# EAGLE board da15-to-de15-passive (EAGLE 6.5.0)
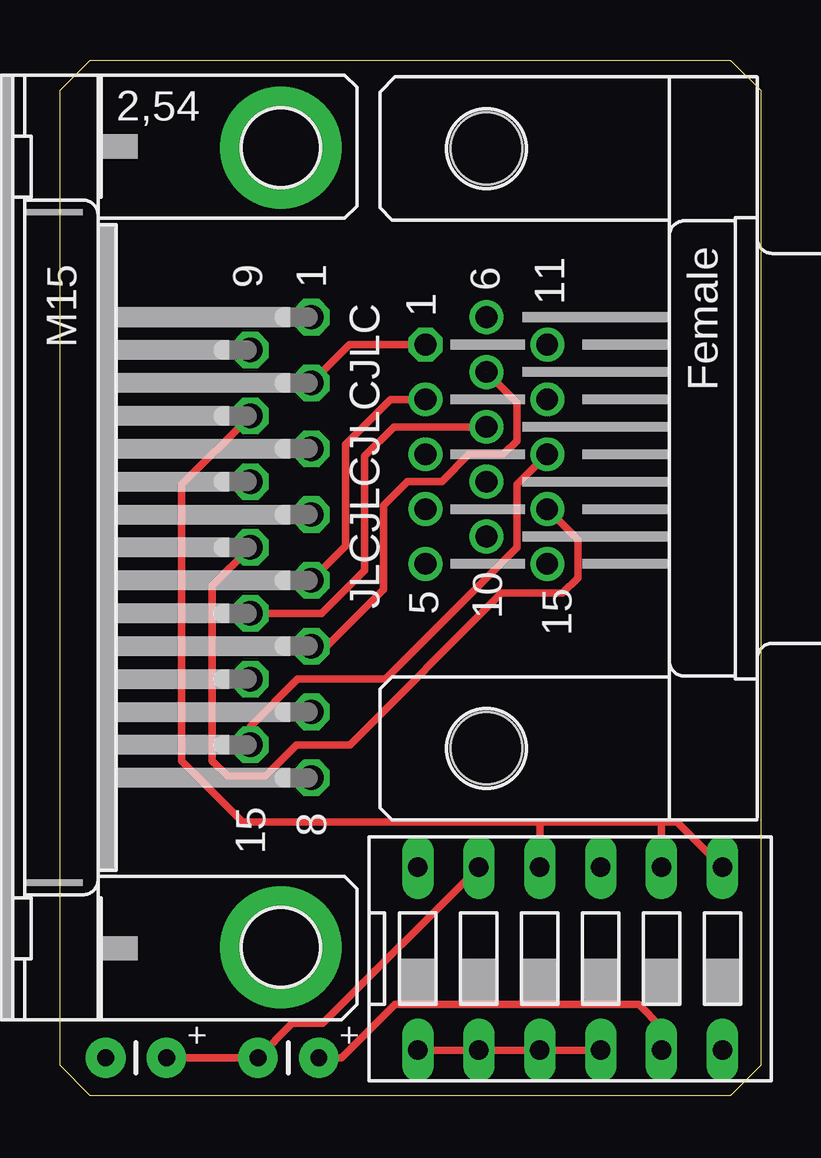
[diagram p0: board, top side]
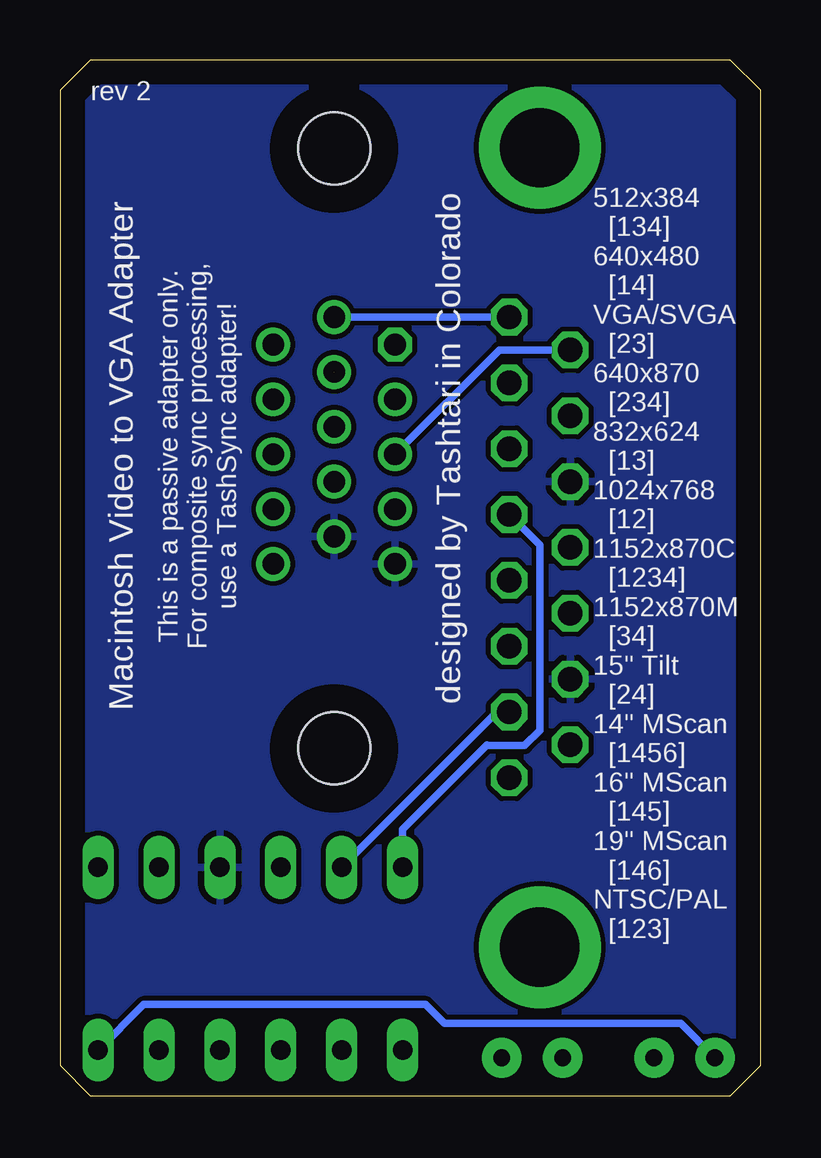
[diagram p1: board, bottom side, seen from below]

Size 29.21 x 43.18 mm. Coordinates in mm from the lower left corner, seen from the top.
Outline: 1.27,0 0,1.27 0,41.91 1.27,43.18 27.94,43.18 29.21,41.91 29.21,1.27 27.94,0 1.27,0
Copper layers (1*16): Top 0.035mm / dielectric 1.5mm / Bottom 0.035mm
Design rules "default": minimum track width 10mil, minimum drill 24mil, track to track 8mil, track to pad 8mil, pad to pad 8mil, via to via 8mil, smd to smd 8mil, copper to edge 40mil, drill to drill 8mil, minimum pad ring 10mil, minimum via ring 8mil, stop-mask expansion 4mil, vias tented up to drill 0mil, thermal gap 10mil

## Footprints (pad centres in the part's own frame; a part is rotated, then mirrored left to right if it is on the bottom)
M15HP = drill 1.016 octagon: 1 -9.601,1.27; 2 -6.858,1.27; 3 -4.115,1.27; 4 -1.372,1.27; 5 1.372,1.27; 6 4.115,1.27; 7 6.858,1.27; 8 9.601,1.27; 9 -8.23,-1.27; 10 -5.486,-1.27; 11 -2.743,-1.27; 12 0,-1.27; 13 2.743,-1.27; 14 5.486,-1.27; 15 8.23,-1.27 | drill 3.302 pad 5.08: G1 -16.662,0; G2 16.662,0
DS-06 = drill 0.813 long: 1 -6.35,-3.81; 2 -3.81,-3.81; 3 -1.27,-3.81; 4 1.27,-3.81; 5 3.81,-3.81; 6 6.35,-3.81; 7 6.35,3.81; 8 3.81,3.81; 9 1.27,3.81; 10 -1.27,3.81; 11 -3.81,3.81; 12 -6.35,3.81
HDF15H = drill 0.9 octagon: 1 4.329,2.54 | drill 0.9: 2 2.043,2.54; 3 -0.243,2.54; 4 -2.529,2.54; 5 -4.815,2.54; 6 5.472,0; 7 3.186,0; 8 0.9,0; 9 -1.386,0; 10 -3.672,0; 11 4.329,-2.54; 12 2.043,-2.54; 13 -0.243,-2.54; 14 -2.529,-2.54; 15 -4.815,-2.54 | hole 3: -12.5,0; 12.5,0
CAP-PTH-SMALL = drill 0.7 pad 1.651: 1 0,0; 2 2.54,0

## Placement (x,y rotation side)
E$1  [M15HP]  9.21,22.86 270 top
E$2  [DS-06]  21.27,5.71 0 top
E$3  [HDF15H]  17.78,26.99 90 top
E$4  [CAP-PTH-SMALL]  4.45,1.59 180 top
E$5  [CAP-PTH-SMALL]  10.79,1.59 180 top

## Library data of the parts
E$1 E$3 = con-subd
E$2 = switch-dil
E$4 E$5 = SparkFun-Passives

## Nets
GND: E$1.11 E$1.14 E$2.9 E$3.5 E$3.10
S$2: E$2.1 E$2.2 E$2.3 E$2.4
S$3: E$1.4 E$2.12
S$4: E$1.2 E$3.1
S$5: E$1.1 E$3.6
S$6: E$1.5 E$3.2
S$7: E$1.9 E$3.3
S$8: E$1.6 E$3.7
S$9: E$1.13 E$3.8
S$10: E$1.7 E$2.11 E$4.1 E$5.2
S$11: E$1.10 E$2.7 E$2.8 E$2.10
S$13: E$2.6 E$4.2
S$14: E$2.5 E$5.1
S$15: E$1.15 E$3.13
S$16: E$1.12 E$3.14

## Tracks (layer width: path | path; a pad name or v marks a point on that pad's centre or on a via)
GND
  pour Bottom: 1.91,0.64 0.64,1.91 0.64,41.27 1.91,42.55 27.3,42.55 28.57,41.27 28.57,1.91 27.3,0.64
S$2
  Top 0.305: E$2.1 E$2.2 E$2.3 E$2.4
S$3
  Bottom 0.305: E$1.4 9.21,22.96 9.21,15.24 9.84,14.61 11.38,14.61 11.4,14.63 14.92,11.11 E$2.12
S$4
  Top 0.305: E$1.2 12.08,31.32 E$3.1
S$5
  Bottom 0.305: E$1.1 11.75,32.46 E$3.6
S$6
  Top 0.305: E$1.5 11.91,22.92 11.91,27.15 13.79,29.03 E$3.2
S$7
  Bottom 0.305: E$1.9 10.89,31.09 E$3.3
S$8  (1 unrouted)
  Top 0.305: E$3.7 19.05,28.89 19.05,27.3 18.49,26.74 17.06,26.74 15.92,25.6 14.49,25.6 13.49,24.61 13.49,21.11 11.12,18.75 E$1.6
S$9
  Top 0.305: E$1.13 10.91,20.12 12.7,21.91 12.7,26.67 13.92,27.89 E$3.8
S$10
  Top 0.305: E$2.11 10.95,3.02 9.68,3.02 E$5.2 E$4.1
  Bottom 0.305: E$2.11 10.99,16 E$1.7
S$11
  Top 0.305: E$1.10 5.08,25.49 5.08,13.97 7.62,11.43 20,11.43 | 20,11.43 25.08,11.43 | E$2.7 25.72,11.43 25.08,11.43 | E$2.8 25.08,11.43 | E$2.10 20,11.43
S$13
  Bottom 0.305: E$4.2 3.33,3.02 13.18,3.02 13.97,3.81 25.72,3.81 E$2.6
S$14
  Top 0.305: E$2.5 25.08,2.86 24.13,3.81 13.97,3.81 11.75,1.59 E$5.1
S$15
  Top 0.305: E$3.13 19.05,25.47 19.05,22.86 13.56,17.37 9.91,17.37 7.94,15.4 E$1.15
S$16
  Top 0.305: E$3.14 21.59,23.19 21.59,21.59 20.95,20.95 18.41,20.95 12.09,14.63 9.87,14.63 8.57,13.34 6.99,13.34 6.35,13.97 6.35,21.27 E$1.12

## Text on the board
tNames: JLCJLCJLCJLC | + | +
bNames: rev 2 | designed by Tashtari in Colorado | This is a passive adapter only. / For composite sync processing, / use a TashSync adapter! | Macintosh Video to VGA Adapter | 512x384 / [134] / 640x480 / [14] / VGA/SVGA / [23] / 640x870 / [234] / 832x624 / [13] / 1024x768 / [12] / 1152x870C / [1234] / 1152x870M / [34] / 15" Tilt / [24] / 14" MScan / [1456] / 16" MScan / [145] / 19" MScan / [146] / NTSC/PAL / [123]